# EAGLE board pled_ir_sensor (EAGLE 5.06)
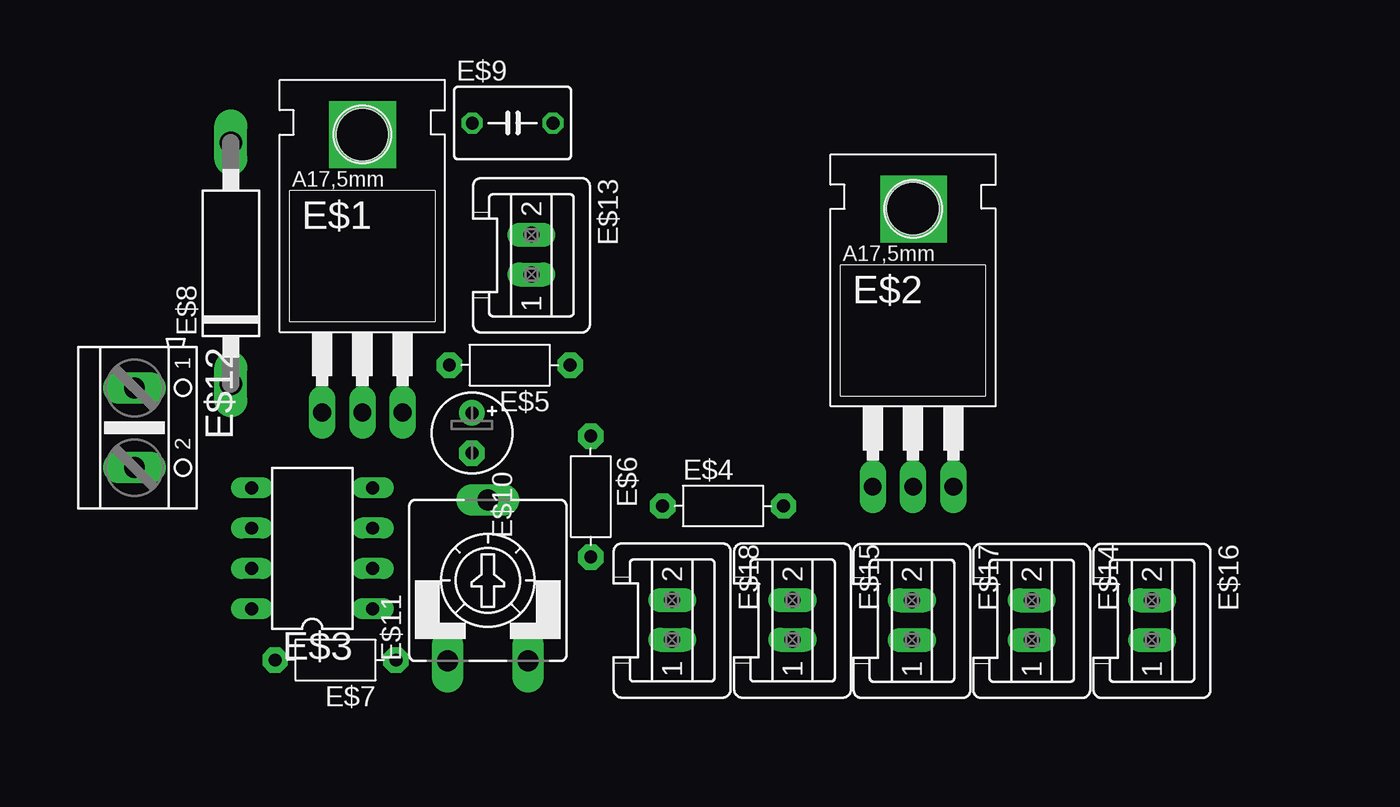
[diagram p0: board, top side]
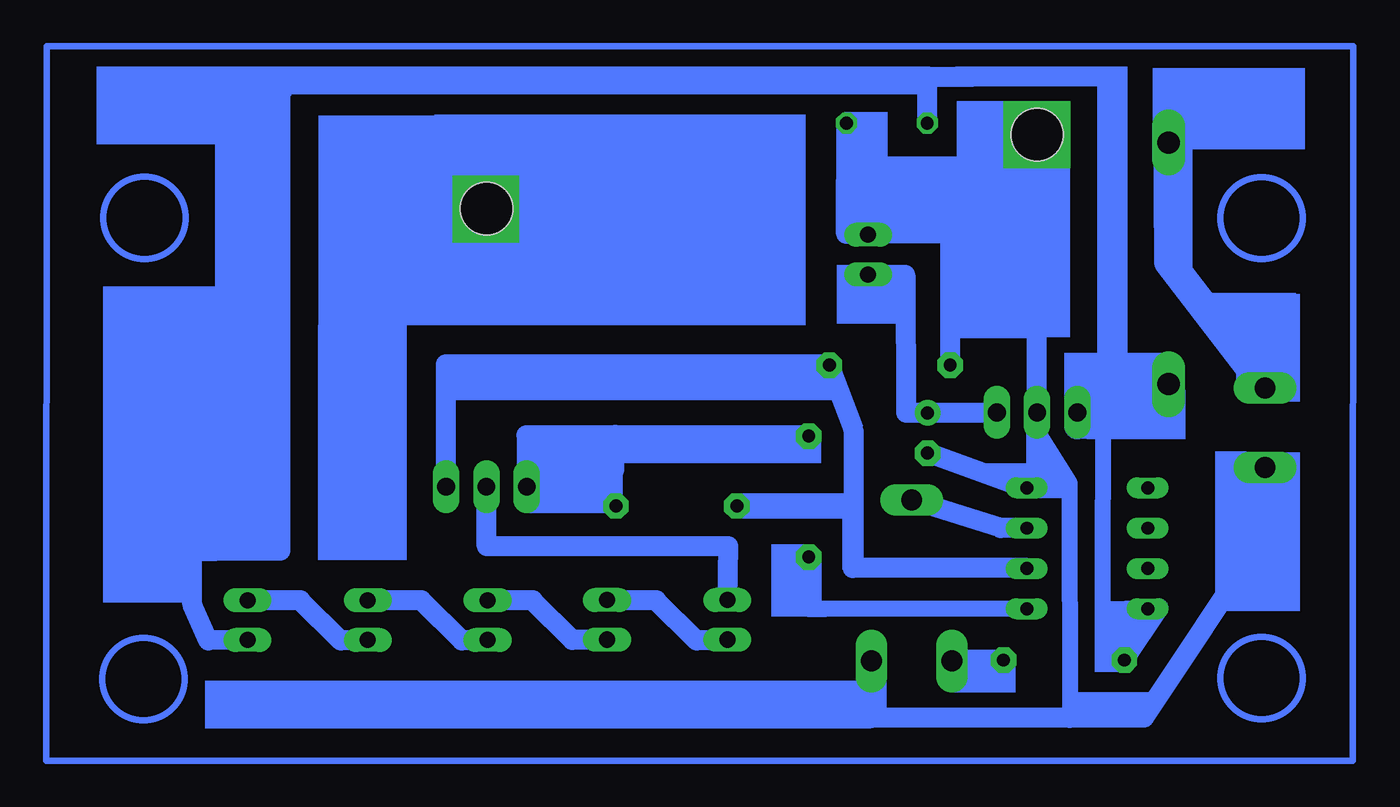
[diagram p1: board, bottom side, seen from below]

No outline drawn. Coordinates in mm, seen from the top.
Copper layers (1*16): Top 0.035mm / dielectric 1.5mm / Bottom 0.035mm
Design rules "default": minimum track width 10mil, minimum drill 24mil, track to track 8mil, track to pad 8mil, pad to pad 8mil, via to via 8mil, smd to smd 8mil, copper to edge 40mil, drill to drill 8mil, minimum pad ring 10mil, minimum via ring 8mil, stop-mask expansion 4mil, vias tented up to drill 0mil, thermal gap 10mil

## Footprints (pad centres in the part's own frame; a part is rotated, then mirrored left to right if it is on the bottom)
TO220 = drill 1.118 long: 1 -2.54,-6.35; 2 0,-6.35; 3 2.54,-6.35 | hole 3.302: 0,11.176
DIL8 = drill 0.813 long: 1 -3.81,-3.81; 2 -1.27,-3.81; 3 1.27,-3.81; 4 3.81,-3.81; 5 3.81,3.81; 6 1.27,3.81; 7 -1.27,3.81; 8 -3.81,3.81
R-7,5 = drill 0.813 pad 1.6 octagon: 1 -3.81,0; 2 3.81,0
C1702-15 = drill 1.397 long: A 7.62,0; C -7.62,0
C050-045X075 = drill 0.813 octagon: 1 -2.54,0; 2 2.54,0
E2,5-5 = drill 0.813 pad 1.6 round: + -1.27,0 | drill 0.813 pad 1.6 octagon: - 1.27,0
CA9V = drill 1.321 long: A -2.54,-5.08; E 2.54,-5.08; S 0,5.08
AK500/2 = drill 1.321 long: 1 -2.515,0; 2 2.515,0
S02P = drill 1.016 long: 1 1.25,0; 2 -1.25,0

## Placement (x,y rotation side)
E$1  [TO220]  19.94,33.6 0 top
E$2  [TO220]  54.66,28.91 0 top
E$3  [DIL8]  16.78,18.68 90 top
E$4  [R-7,5]  42.68,21.35 0 top
E$5  [R-7,5]  29.23,30.23 180 top
E$6  [R-7,5]  34.34,21.94 270 top
E$7  [R-7,5]  18.25,11.63 180 top
E$8  [C1702-15]  11.65,36.65 90 top
E$9  [C050-045X075]  29.41,45.5 0 top
E$10  [E2,5-5]  26.85,25.95 270 top
E$11  [CA9V]  27.85,16.65 0 top
E$12  [AK500/2]  5.57,26.28 270 top
E$13  [S02P]  30.6,37.2 270 top
E$14  [S02P]  62.14,14.15 270 top
E$15  [S02P]  47.06,14.17 270 top
E$16  [S02P]  69.72,14.15 270 top
E$17  [S02P]  54.59,14.15 270 top
E$18  [S02P]  39.47,14.17 270 top

## Library data of the parts
E$1 E$2 = ref-packages
E$3 = on-semiconductor
E$4-E$7 = discrete
E$8 = diode
E$9 E$10 = rcl
E$11 = pot
E$12 = con-ptr500
E$13-E$18 = con-amp-mt

## Tracks (layer width: path | path; a pad name or v marks a point on that pad's centre or on a via)
S$1
  Bottom 0.406: 0.04,5.29 0,50.35 82.38,50.35 82.42,5.29 0.04,5.29
S$2
  Bottom 1.93: 5.57,28.85 11.62,36.73 11.66,45.39
S$3
  Bottom 1.27: 28.25,35.91 28.21,27.23 22.53,27.23
S$4
  Bottom 1.27: 20.6,19.95 22.23,19.95 27.86,21.72
S$5
  Bottom 1.016: 17.85,7.99 17.89,22.63
  Bottom 1.27: 5.57,23.94 5.57,19.48 13.2,7.99 17.85,7.99
S$6
  Bottom 1.27: 20.39,22.5 20.69,22.46 26.83,24.69
S$7
  Bottom 1.27: 14.43,11.67 12.28,14.91
S$8
  Bottom 1.676: 17.41,26.4 17.41,29.12 11.75,29.12
S$9
  Bottom 1.27: 17.89,7.98 30.38,7.98 30.38,11.8
S$10
  Bottom 1.27: 21.89,11.63 25.53,11.63
S$11
  Bottom 1.27: 15.29,28.9 15.26,48.41
S$12
  Bottom 1.27: 29.59,38.5 31.98,38.5 31.96,45.43
S$13
  Bottom 1.016: 20.43,14.87 34.24,14.87
S$14
  Bottom 1.27: 34.27,25.8 52.13,25.8 52.13,22.46
S$15
  Bottom 1.27: 20.65,17.45 31.58,17.44
S$16
  Bottom 1.27: 25.41,30.27 25.41,33.02 19.98,38.45
S$17
  Bottom 1.016: 17.88,22.77 19.95,26.09
  Bottom 1.27: 30.03,38.5 19.95,38.51 19.95,26.09
S$18
  Bottom 1.016: 13.03,14.91 15.81,14.86 15.78,28.62
S$19
  Bottom 1.27: 33.06,30.23 31.53,26.17 31.53,17.45
S$20
  Bottom 1.27: 26.85,45.46 26.85,48.43 26.8,48.43 | 26.8,48.43 23.97,48.43 | 26.8,48.43 67.65,48.43 67.65,18.53 72.98,18.53
S$21
  Bottom 1.016: 46.54,21.17 46.54,25.96 46.5,23.54
S$22
  Bottom 1.27: 33.11,30.27 57.22,30.27 57.22,22.19
S$23
  Bottom 1.27: 39.46,15.41 39.41,18.8 54.64,18.8 54.64,22.43
S$24
  Bottom 1.27: 39.46,12.86 41.41,12.86 43.96,15.41 47.02,15.41
S$25
  Bottom 1.27: 47.07,12.9 49.24,12.9 51.75,15.41 54.76,15.41
S$26
  Bottom 1.27: 54.58,12.86 56.2,12.86 58.75,15.41 62.23,15.41
S$27
  Bottom 1.27: 62.09,12.86 63.85,12.86 66.4,15.41 69.74,15.41
S$28
  Bottom 1.27: 69.73,12.91 72.19,12.86 73.21,15.14 73.21,18.57
S$29
  Bottom 1.27: 18.14,22.46 19.99,22.46 19.99,26.36
S$30
  Bottom 1.016: 31.53,21.21 38.89,21.17
S$31
  Bottom 1.016: 34.31,18.15 34.31,14.85 33.34,14.85
S$32
  Bottom 1.27: 15.39,48.41 25.09,48.41
S$33  (via drill 3.2)
  other vias: 19.95,44.76
S$34  (via drill 3.2)
  other vias: 54.7,40.08
(copper drawn outside any net)
  shapes: Bottom area x51, Bottom circle x4